# EAGLE board FWE-Category1 (EAGLE 9.6.2)
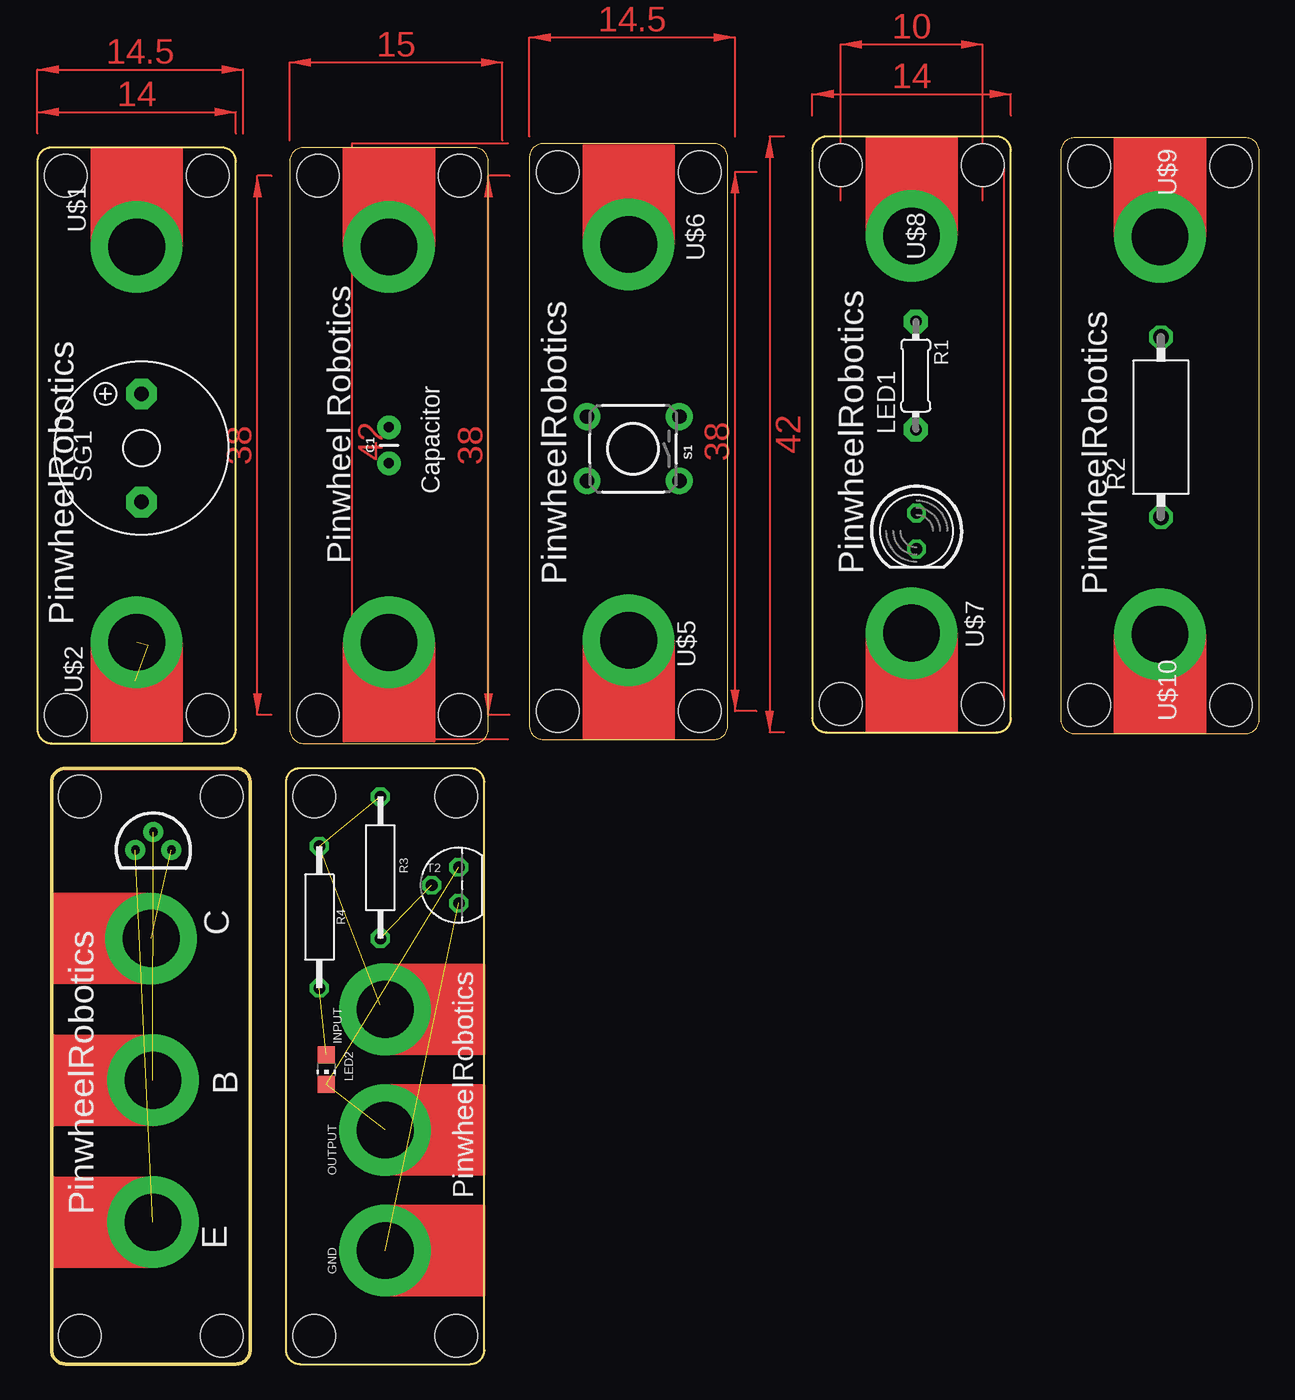
[diagram p0: board, top side]
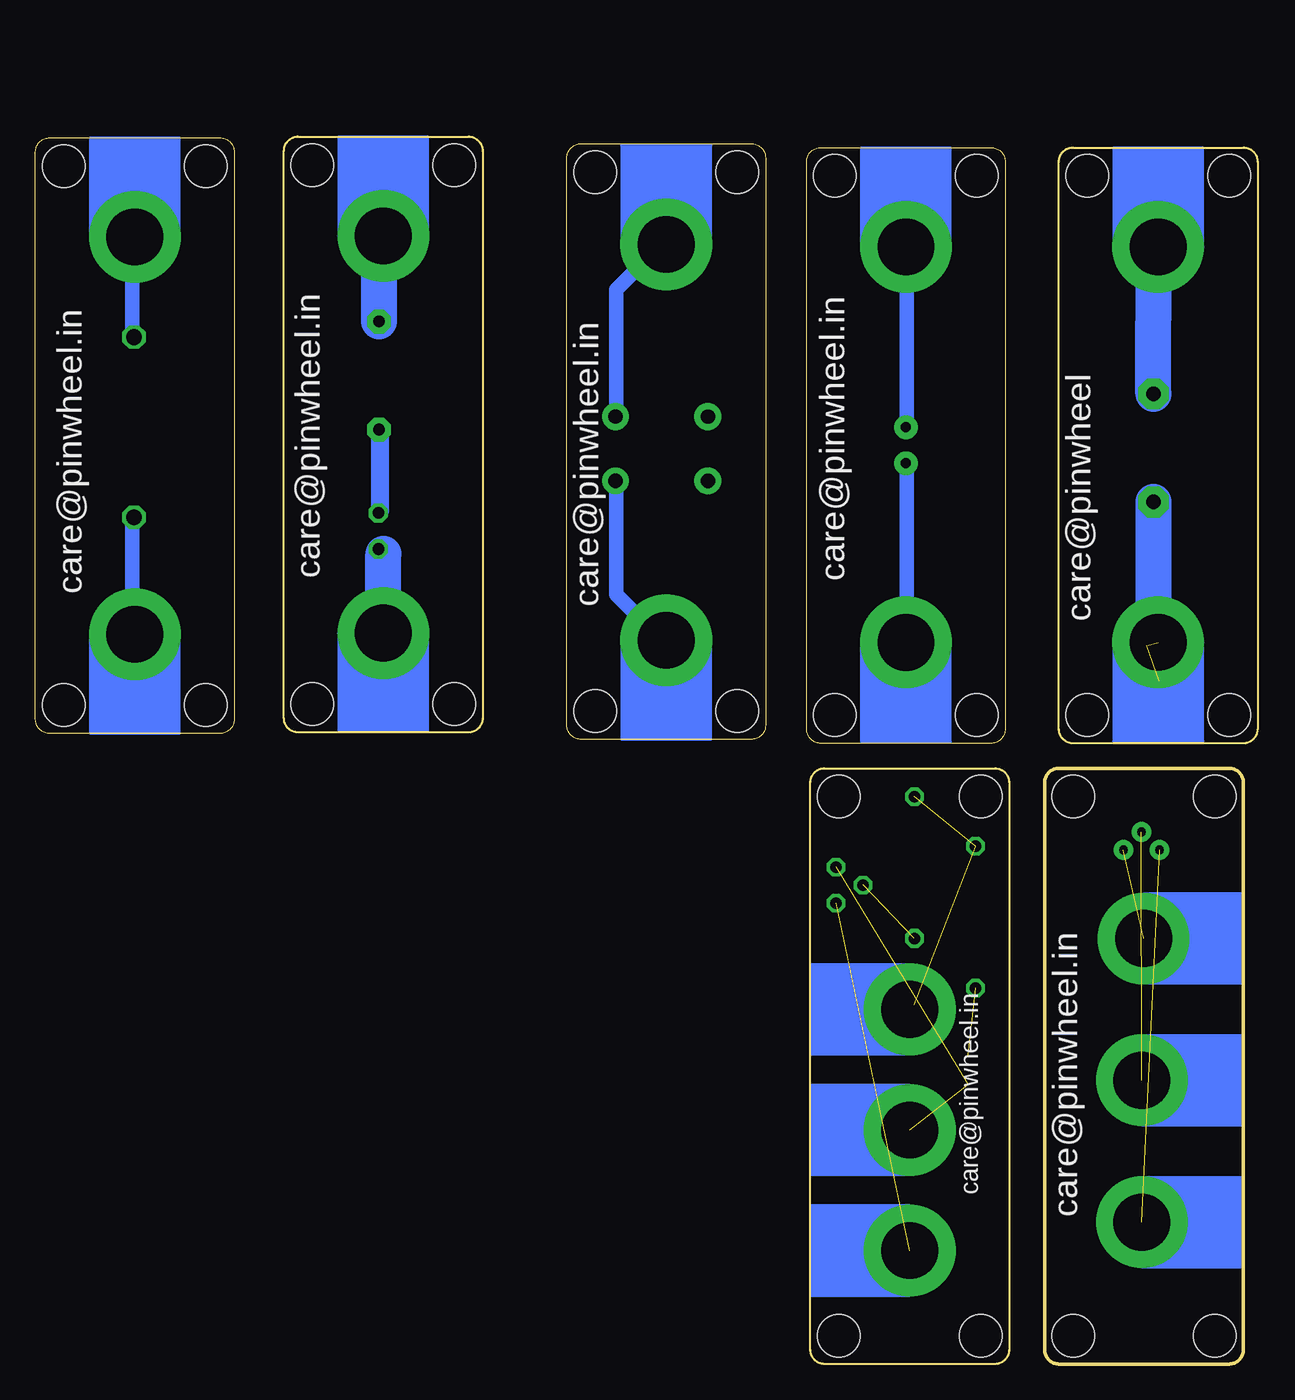
[diagram p1: board, bottom side, seen from below]

Size 86.12 x 86.53 mm. Coordinates in mm from the lower left corner, seen from the top.
Outline: 0,84.76 0,44.76 arc90 1,43.76 13,43.76 arc90 14,44.76 14,84.76 arc90 13,85.76 1,85.76 arc90 0,84.76
Outline: 17.78,84.76 17.78,44.76 arc90 18.78,43.76 30.78,43.76 arc90 31.78,44.76 31.78,84.76 arc90 30.78,85.76 18.78,85.76 arc90 17.78,84.76
Outline: 47.67,86.03 35.67,86.03 arc90 34.67,85.03 34.67,45.03 arc90 35.67,44.03 47.67,44.03 arc90 48.67,45.03 48.67,85.03 arc90 47.67,86.03
Outline: 55.61,44.53 67.61,44.53 arc90 68.61,45.53 68.61,85.53 arc90 67.61,86.53 55.61,86.53 arc90 54.61,85.53 54.61,45.53 arc90 55.61,44.53
Outline: 85.12,86.45 73.12,86.45 arc90 72.12,85.45 72.12,45.45 arc90 73.12,44.45 85.12,44.45 arc90 86.12,45.45 86.12,85.45 arc90 85.12,86.45
Outline: 14,0 2,0 arc-90 1,1 1,41 arc-90 2,42 14,42 arc-90 15,41 15,1 arc-90 14,0
Outline: 18.51,0 30.51,0 arc90 31.51,1 31.51,41 arc90 30.51,42 18.51,42 arc90 17.51,41 17.51,1 arc90 18.51,0
Copper layers (1*16): Top 0.035mm / dielectric 1.5mm / Bottom 0.035mm
Design rules "default": minimum track width 6mil, minimum drill 0.35mm, track to track 6mil, track to pad 6mil, pad to pad 6mil, via to via 6mil, smd to smd 6mil, copper to edge 40mil, drill to drill 6mil, minimum pad ring 10mil, minimum via ring 8mil, stop-mask expansion 4mil, vias tented up to drill 0mil, thermal gap 10mil
Holes 3 mm at 2,83.76 12,83.76 2,45.76 12,45.76 19.78,83.76 29.78,83.76 19.78,45.76 29.78,45.76 36.67,84.03 46.67,84.03 36.67,46.03 46.67,46.03 56.61,84.53 56.61,46.53 66.61,46.53 66.61,84.53 74.12,84.45 84.12,84.45 74.12,46.45 84.12,46.45 13,40 13,2 3,2 3,40 19.51,2 19.51,40 29.51,40 29.51,2

## Footprints (pad centres in the part's own frame; a part is rotated, then mirrored left to right if it is on the bottom)
CAP-PTH-2.54 = drill 0.7 pad 1.651: 1 -1.27,0; 2 1.27,0
MICROBIT_PAD = drill 4 pad 6.452: PAD 0,0
LED5MM = drill 0.813 octagon: A -1.27,0; K 1.27,0
CHIP-LED0805 = smd 1.2 x 1.2: A 0,-1.05; C 0,1.05
0204/7 = drill 0.813 pad 1.676 octagon: 1 -3.81,0; 2 3.81,0
VMTB60 = drill 1.1 octagon: 1 -6.35,0; 2 6.35,0
R0207/10 = drill 0.813 octagon: 1 -5,0; 2 5,0
TACTILE_SWITCH_PTH_6.0MM = drill 1.016 pad 1.88: 1 -3.251,2.261; 2 3.251,2.261; 3 -3.251,-2.261; 4 3.251,-2.261
F/TMB = drill 1.016 pad 2.159 octagon: + 3.81,0; - -3.81,0
TO92 = drill 0.61 pad 1.397: 1 0,0; 2 1.27,1.27; 3 2.54,0
TO92' = drill 0.813 octagon: 1 1.27,0; 2 0,1.905; 3 -1.27,0

## Placement (x,y rotation side)
C1  22pF  [CAP-PTH-2.54]  24.78,64.78 90 top
GND  MICROBIT_PAD  [MICROBIT_PAD]  24.51,8 90 top
INPUT  MICROBIT_PAD  [MICROBIT_PAD]  24.51,25 90 top
LED1  [LED5MM]  61.96,58.72 270 top
LED2  [CHIP-LED0805]  20.37,20.76 180 top
OUTPUT  MICROBIT_PAD  [MICROBIT_PAD]  24.51,16.5 90 top
R1  [0204/7]  61.91,69.69 270 top
R2  [VMTB60]  79.18,66.04 90 top
R3  [R0207/10]  24.18,35 270 top
R4  [R0207/10]  19.87,31.5 90 top
S1  MOMENTARY-SWITCH-SPST-PTH-6.0MM  [TACTILE_SWITCH_PTH_6.0MM]  41.99,64.53 180 top
SG1  F/TMB  [F/TMB]  7.34,64.58 90 top
T1  BC547N  [TO92]  6.91,36.24 0 top
T2  2N3904  [TO92']  29.7,33.76 90 top
U$1  MICROBIT_PAD  [MICROBIT_PAD]  7,78.76 180 top
U$2  MICROBIT_PAD  [MICROBIT_PAD]  7,50.88 0 top
U$3  MICROBIT_PAD  [MICROBIT_PAD]  24.78,78.76 180 top
U$4  MICROBIT_PAD  [MICROBIT_PAD]  24.78,50.87 0 top
U$5  MICROBIT_PAD  [MICROBIT_PAD]  41.67,51.03 0 top
U$6  MICROBIT_PAD  [MICROBIT_PAD]  41.67,78.93 180 top
U$7  MICROBIT_PAD  [MICROBIT_PAD]  61.61,51.53 0 top
U$8  MICROBIT_PAD  [MICROBIT_PAD]  61.61,79.53 180 top
U$9  MICROBIT_PAD  [MICROBIT_PAD]  79.12,79.45 180 top
U$10  MICROBIT_PAD  [MICROBIT_PAD]  79.12,51.44 0 top
U$11  MICROBIT_PAD  [MICROBIT_PAD]  8.03,30 270 top
U$12  MICROBIT_PAD  [MICROBIT_PAD]  8.15,20 270 top
U$13  MICROBIT_PAD  [MICROBIT_PAD]  8.15,10 270 top

## Library data of the parts
C1 = SparkFun-Capacitors; PROD_ID: CAP-09128
GND INPUT OUTPUT U$1-U$13 = microbit
LED1 LED2 = led
R1 = adafruit
R2 = rcl; SPICEPREFIX: R
R3 R4 = we-rcl
S1 = SparkFun-Switches; PROD_ID: SWCH-08441; SF_SKU: COM-00097
SG1 = buzzer; OC_FARNELL: unknown; OC_NEWARK: unknown
T1 = BC547; AVAILABILITY: In Stock; CHECK_PRICES: https://www.snapeda.com/parts/BC547/Onsemi/view-part/?ref=eda; DESCRIPTION: Trans GP BJT NPN 45V 0.1A 500mW 3-Pin TO-92 T/R; MF: ON Semiconductor; MP: BC547; PACKAGE: None; PRICE: None; PURCHASE-URL: https://www.snapeda.com/api/url_track_click_mouser/?unipart_id=11254981&manufacturer=ON Semiconductor&part_name=BC547&search_term=None; SNAPEDA_LINK: https://www.snapeda.com/parts/BC547/Onsemi/view-part/?ref=snap
T2 = transistor

## Nets
5V: INPUT.PAD R3.1 R4.2
GND: GND.PAD T2.3
N$1: SG1.+ U$1.PAD
N$2: SG1.- U$2.PAD
N$3: C1.1 U$4.PAD
N$4: C1.2 U$3.PAD
N$5: S1.1 U$5.PAD
N$6: S1.3 U$6.PAD
N$7: LED1.K U$7.PAD
N$8: LED1.A R1.2
N$9: R1.1 U$8.PAD
N$10: R2.1 U$10.PAD
N$11: R2.2 U$9.PAD
N$12: T1.1 U$13.PAD
N$13: T1.3 U$11.PAD
N$14: LED2.A R4.1
N$15: LED2.C OUTPUT.PAD T2.1
N$16: R3.2 T2.2
T1: T1.2 U$12.PAD

## Tracks (layer width: path | path; a pad name or v marks a point on that pad's centre or on a via)
5V  (2 unrouted)
  Top 0.381: INPUT.PAD 24.18,25.34
GND  (1 unrouted)
N$1
  Bottom 2.54: SG1.+ 7.31,78.75 U$1.PAD
N$2  (2 unrouted)
  Bottom 0.152: 6.92,48.14 6.63,47.86
  Bottom 2.54: SG1.- 7.34,51.12 7.8,50.66
N$3
  Bottom 0.508: 24.71,63.24 C1.1 | 24.71,51.02 U$4.PAD
  Bottom 1.016: 24.71,51.02 24.71,63.24
N$4
  Bottom 0.508: 24.71,66.21 C1.2 | 24.71,78.43 U$3.PAD
  Bottom 1.016: 24.71,78.43 24.71,66.21
N$5
  Bottom 0.152: 45.19,62.17 S1.1 | 41.98,51.04 U$5.PAD
  Bottom 1.016: 45.19,62.17 45.19,54.24 41.98,51.04
N$6
  Bottom 0.152: 45.19,66.89 S1.3 | 41.98,78.93 U$6.PAD
  Bottom 1.016: 45.19,66.89 45.19,75.73 41.98,78.93
N$7
  Bottom 1.27: LED1.K 61.61,57.1
  Bottom 2.54: U$7.PAD 61.61,57.1
N$8
  Bottom 0.152: 61.86,60.03 LED1.A | 61.86,65.76 R1.2
  Bottom 1.27: 61.86,65.76 61.86,60.03
N$9
  Bottom 1.27: U$8.PAD 61.91,79.23
  Bottom 2.54: R1.1 61.91,79.23
N$10
  Bottom 0.152: 79.28,59.69 R2.1 | 79.28,51.46 U$10.PAD
  Bottom 1.016: 79.28,51.46 79.28,59.69
N$11
  Bottom 0.152: 79.28,72.49 R2.2 | 79.28,79.35 U$9.PAD
  Bottom 1.016: 79.28,79.35 79.28,72.49
N$12  (1 unrouted)
N$13  (1 unrouted)
N$14  (1 unrouted)
N$15  (2 unrouted)
N$16  (1 unrouted)
T1  (1 unrouted)
(copper drawn outside any net)
  shapes: Top area x12

## Text on the board
tPlace: Capacitor | Pinwheel Robotics | PinwheelRobotics | PinwheelRobotics | PinwheelRobotics | PinwheelRobotics | C | B | PinwheelRobotics | PinwheelRobotics | E
bPlace: care@pinwheel.in | care@pinwheel.in | care@pinwheel.in | care@pinwheel.in | care@pinwheel | care@pinwheel.in | care@pinwheel.in